# Altium PCB POETIC_AD_Input_V2.PcbDoc
Units mm, origin at the board's own origin, x right, y up, seen from the top; angles counter-clockwise.
Board outline 60 x 130 mm, 2 copper layers (Top Layer, Bottom Layer), stack 1.57 mm thick; 90 components, 63 nets, 313 pads, 24 vias.
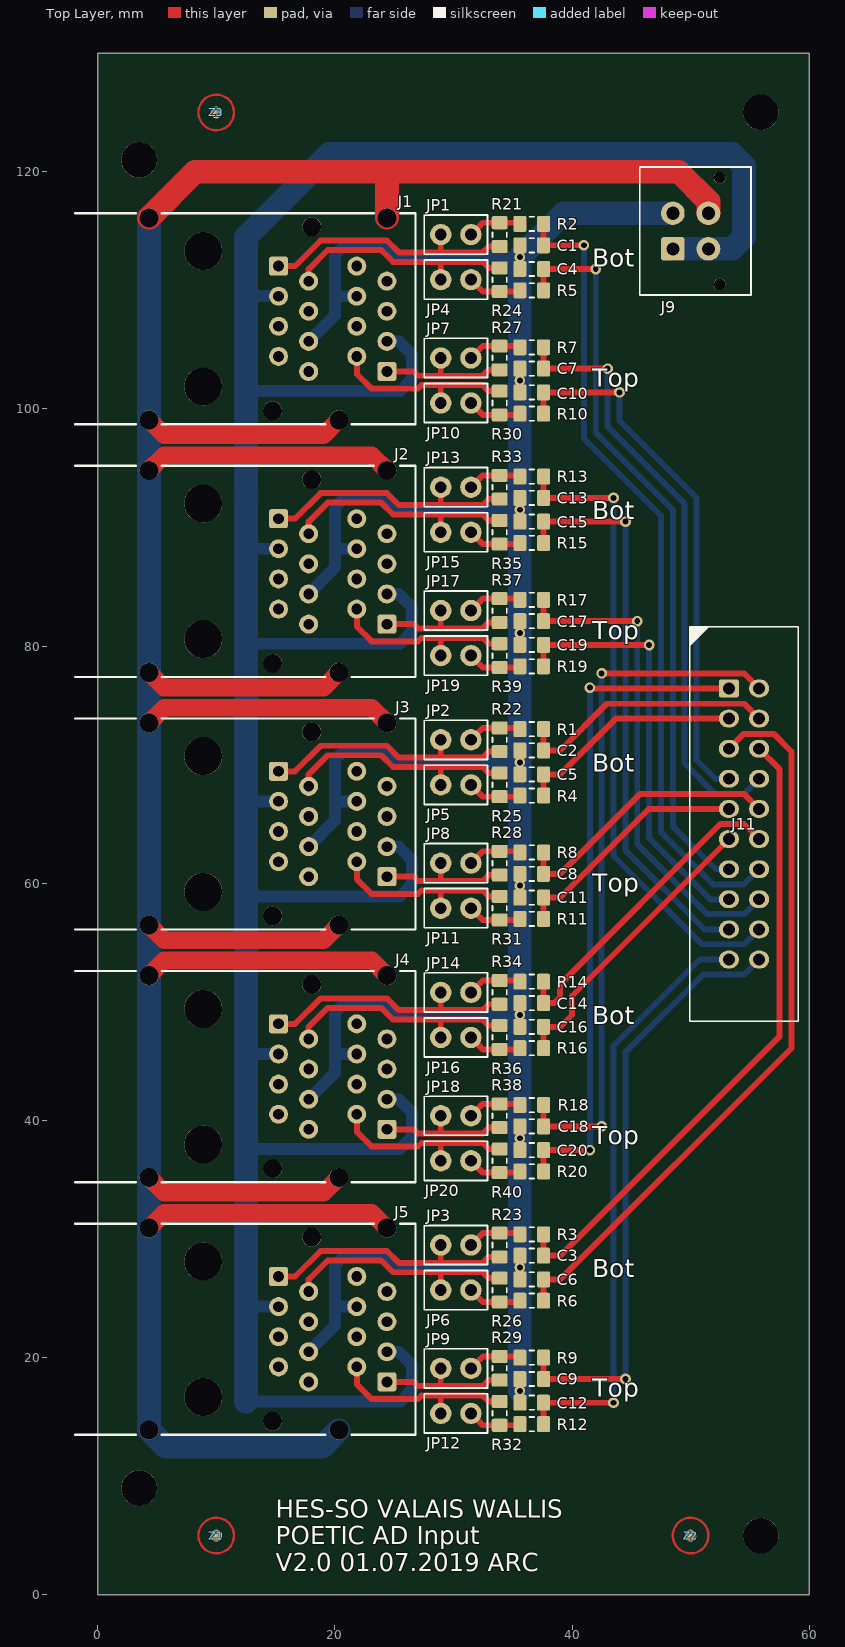
[diagram p0: Top Layer view]
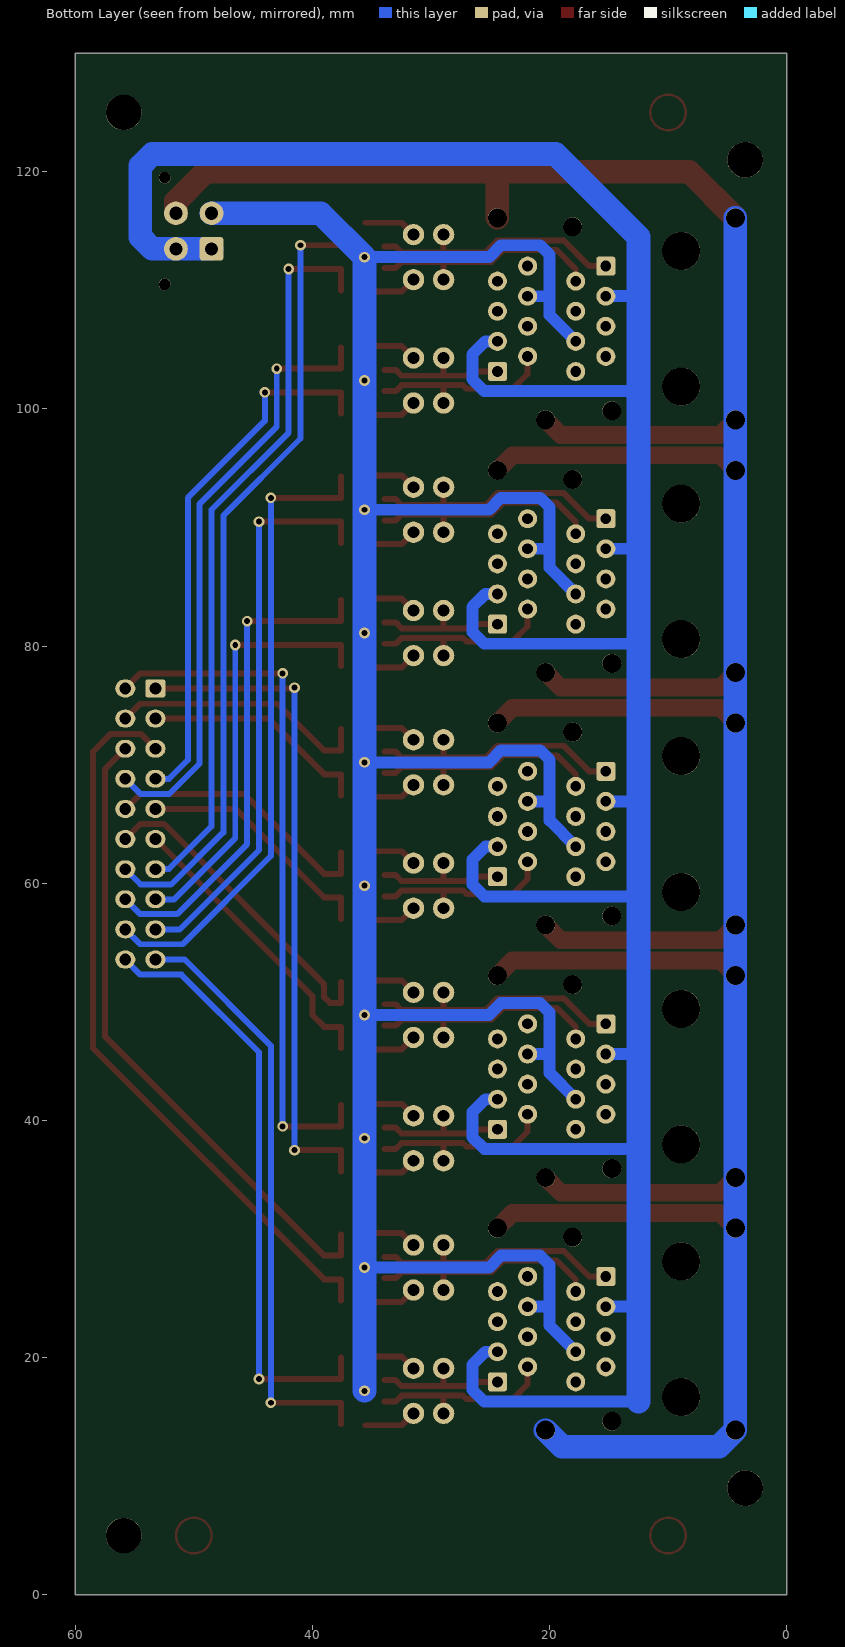
[diagram p1: Bottom Layer view, seen from below]

## Layer stack, top to bottom
Top Layer: signal copper 0.035
Dielectric 1: core 1.5, FR-4, Dk 4.2
Bottom Layer: signal copper 0.035

## Board outline
0,0 0,130 60,130 60,0

## Design rules (kind name [scope] priority, off if disabled: settings)
AcuteAngle [All] p1: minimum=9.00000000000000E+0001 checktracksonly=TRUE
AssemblyTestPointUsage [All] p1 off:
AssemblyTestpoint [All] p1 off: testpointundercomponent=TRUE minsize=1.016 maxsize=2.54 preferedsize=1.524 minholesize=0 maxholesize=1.016 preferedholesize=0.813 testpointgrid=0.025 usegrid=TRUE gridtolerance=0 allowsidetop=TRUE allowsidebottom=TRUE
BoardOutlineClearance [All] p1 off: gap=0.25 ignorepadtopadclearanceinfootprint=FALSE
Clearance [All] p1: gap=0.25 ignorepadtopadclearanceinfootprint=FALSE except(0: Arc-Hole Track-Hole SMDPad-Hole THPad-Hole Via-Hole Fill-Hole Poly-Hole Region-Hole Text-Hole)
ComponentClearance [All] p1 off: gap=0.25 collisioncheckmode=3 verticalgap=0.25 showdistances=FALSE
DiffPairsRouting [All] p1 off: maxlimit=0.254 minlimit=0.254 mostfreqgap=0.254 toplayer_minwidth=0.381 toplayer_maxwidth=0.381 toplayer_prefwidth=0.381 bottomlayer_minwidth=0.381 bottomlayer_maxwidth=0.381 bottomlayer_prefwidth=0.381 maxuncoupledlength=12.7
FabricationTestPointUsage [All] p1 off: valid=0 allowmultiple=FALSE
FabricationTestpoint [All] p1 off: side=3 testpointundercomponent=TRUE minsize=1.016 maxsize=2.54 preferedsize=1.524 minholesize=0 maxholesize=1.016 preferedholesize=0.813 testpointgrid=0.025 allowsidetop=TRUE allowsidebottom=TRUE usegrid=TRUE gridtolerance=0
FanoutControl Fanout_BGA [IsBGA] p1 off: bgadir=Out bgaviamode=Centered fanoutstyle=Auto fanoutdirection=Alternating viagrid=0.025 // Fanout_BGA (Default Rule)
FanoutControl Fanout_LCC [IsLCC] p2 off: bgadir=Out bgaviamode=Centered fanoutstyle=Auto fanoutdirection=Alternating viagrid=0.025 // Fanout_LCC (Default Rule)
FanoutControl Fanout_SOIC [IsSOIC] p3 off: bgadir=Out bgaviamode=Centered fanoutstyle=Auto fanoutdirection=Alternating viagrid=0.025 // Fanout_SOIC (Default Rule)
FanoutControl Fanout_Small [(CompPinCount < 5)] p4 off: bgadir=Out bgaviamode=Centered fanoutstyle=Auto fanoutdirection=OutThenIn viagrid=0.025 // Fanout_Small (Default Rule)
FanoutControl Fanout_Default [All] p5 off: bgadir=Out bgaviamode=Centered fanoutstyle=Auto fanoutdirection=Alternating viagrid=0.025 // Fanout_Default (Default Rule)
Height [All] p1 off: minheight=0 maxheight=25.4 prefheight=12.7
HoleSize [All] p1 off: absolutevalues=TRUE maxlimit=3 minlimit=0.15 maxpercent=80.000 minpercent=20.000
HoleToHoleClearance [All] p1 off: gap=0.25 allowstackedmicrovias=TRUE
LayerPairs [All] p1 off: enforce=TRUE
MinimumAnnularRing [All] p1 off: minimumring=0.35
MinimumSolderMaskSliver [All] p1 off: minsoldermaskwidth=0
PasteMaskExpansion [All] p1 off: expansion=0
PlaneClearance [All] p1: clearance=0.25
PlaneConnect [All] p1 off: planeconnectstyle=Relief reliefexpansion=0.5 reliefentries=4 reliefconductorwidth=0.25 reliefairgap=0.25
PolygonConnect [All] p1 off: connectstyle=Relief reliefconductorwidth=0.25 reliefentries=4 polygonreliefangle="90 Angle" airgapwidth=0.25
RoutingCorners [All] p1 off: cornerstyle=45-Degree minsetback=2.5 maxsetback=2.5
RoutingLayers [All] p1 off: top layer_v5=TRUE bottom layer_v5=TRUE
RoutingPriority [All] p1 off: routingpriority=0
RoutingTopology [All] p1 off: topology=Shortest
RoutingVias [All] p1: holewidth=0.5 width=0.9 viastyle="Through Hole" minholewidth=0.5 minwidth=0.9 maxholewidth=0.5 maxwidth=0.9
SilkToBoardRegionClearance [All] p1 off:
SilkToSilkClearance [All] p1 off: silktosilkclearance=0
SilkToSolderMaskClearance [IsPad] p1 off: minsilkscreentomaskgap=0 clearancetoexposedcopper=TRUE
SolderMaskExpansion [All] p1 off: expansion=0
Width [All] p1: maxlimit=10 minlimit=0.2 preferedwidth=0.5
4 further rules are at their usual default settings.

## Components (designator, comment, footprint, x,y, rotation, side; value= is the part's Value field where it differs from the comment)
C1 "4p7" "CAPACITOR 2012 REFLOW" 36.6,113.8 r180 top
C2 "4p7" "CAPACITOR 2012 REFLOW" 36.6,71.2 r180 top
C3 "4p7" "CAPACITOR 2012 REFLOW" 36.6,28.6 r180 top
C4 "4p7" "CAPACITOR 2012 REFLOW" 36.6,111.8 r0 top
C5 "4p7" "CAPACITOR 2012 REFLOW" 36.6,69.19 r0 top
C6 "4p7" "CAPACITOR 2012 REFLOW" 36.6,26.6 r0 top
C7 "4p7" "CAPACITOR 2012 REFLOW" 36.6,103.4 r180 top
C8 "4p7" "CAPACITOR 2012 REFLOW" 36.6,60.8 r180 top
C9 "4p7" "CAPACITOR 2012 REFLOW" 36.6,18.2 r180 top
C10 "4p7" "CAPACITOR 2012 REFLOW" 36.6,101.4 r0 top
C11 "4p7" "CAPACITOR 2012 REFLOW" 36.6,58.8 r0 top
C12 "4p7" "CAPACITOR 2012 REFLOW" 36.6,16.2 r0 top
C13 "4p7" "CAPACITOR 2012 REFLOW" 36.6,92.5 r180 top
C14 "4p7" "CAPACITOR 2012 REFLOW" 36.6,49.9 r180 top
C15 "4p7" "CAPACITOR 2012 REFLOW" 36.6,90.5 r0 top
C16 "4p7" "CAPACITOR 2012 REFLOW" 36.6,47.9 r0 top
C17 "4p7" "CAPACITOR 2012 REFLOW" 36.6,82.1 r180 top
C18 "4p7" "CAPACITOR 2012 REFLOW" 36.6,39.5 r180 top
C19 "4p7" "CAPACITOR 2012 REFLOW" 36.6,80.1 r0 top
C20 "4p7" "CAPACITOR 2012 REFLOW" 36.6,37.5 r0 top
J1 "E5908-4V0S54-L" "RJ45 8P8C PULSE E5908-4V0S54-L" 8.9,107.6 r270 top
J2 "E5908-4V0S54-L" "RJ45 8P8C PULSE E5908-4V0S54-L" 8.9,86.3 r270 top
J3 "E5908-4V0S54-L" "RJ45 8P8C PULSE E5908-4V0S54-L" 8.9,65 r270 top
J4 "E5908-4V0S54-L" "RJ45 8P8C PULSE E5908-4V0S54-L" 8.9,43.7 r270 top
J5 "E5908-4V0S54-L" "RJ45 8P8C PULSE E5908-4V0S54-L" 8.9,22.4 r270 top
J9 "43045-0412" "MOLEX 43045-0412" 50,115 r270 top
J11 "61202021621" "FlatCable2x10 2.54MM Straight TH" 54.5,65 r270 top
JP1 "890-18-036-10-803" "JUMPER2 TH" 30.2,114.7 r0 top
JP2 "890-18-036-10-803" "JUMPER2 TH" 30.2,72.1 r0 top
JP3 "890-18-036-10-803" "JUMPER2 TH" 30.2,29.5 r0 top
JP4 "890-18-036-10-803" "JUMPER2 TH" 30.2,110.9 r0 top
JP5 "890-18-036-10-803" "JUMPER2 TH" 30.2,68.3 r0 top
JP6 "890-18-036-10-803" "JUMPER2 TH" 30.2,25.7 r0 top
JP7 "890-18-036-10-803" "JUMPER2 TH" 30.2,104.3 r0 top
JP8 "890-18-036-10-803" "JUMPER2 TH" 30.2,61.7 r0 top
JP9 "890-18-036-10-803" "JUMPER2 TH" 30.2,19.1 r0 top
JP10 "890-18-036-10-803" "JUMPER2 TH" 30.2,100.5 r0 top
JP11 "890-18-036-10-803" "JUMPER2 TH" 30.2,57.9 r0 top
JP12 "890-18-036-10-803" "JUMPER2 TH" 30.2,15.3 r0 top
JP13 "890-18-036-10-803" "JUMPER2 TH" 30.2,93.4 r0 top
JP14 "890-18-036-10-803" "JUMPER2 TH" 30.2,50.8 r0 top
JP15 "890-18-036-10-803" "JUMPER2 TH" 30.2,89.6 r0 top
JP16 "890-18-036-10-803" "JUMPER2 TH" 30.2,47 r0 top
JP17 "890-18-036-10-803" "JUMPER2 TH" 30.2,83 r0 top
JP18 "890-18-036-10-803" "JUMPER2 TH" 30.2,40.4 r0 top
JP19 "890-18-036-10-803" "JUMPER2 TH" 30.2,79.2 r0 top
JP20 "890-18-036-10-803" "JUMPER2 TH" 30.2,36.6 r0 top
R1 "1k8" "RESISTOR 2012 REFLOW" 36.6,73 r0 top
R2 "1k8" "RESISTOR 2012 REFLOW" 36.6,115.6 r0 top
R3 "1k8" "RESISTOR 2012 REFLOW" 36.6,30.4 r0 top
R4 "1k8" "RESISTOR 2012 REFLOW" 36.6,67.4 r0 top
R5 "1k8" "RESISTOR 2012 REFLOW" 36.6,110 r0 top
R6 "1k8" "RESISTOR 2012 REFLOW" 36.6,24.8 r0 top
R7 "1k8" "RESISTOR 2012 REFLOW" 36.6,105.2 r0 top
R8 "1k8" "RESISTOR 2012 REFLOW" 36.6,62.6 r0 top
R9 "1k8" "RESISTOR 2012 REFLOW" 36.6,20 r0 top
R10 "1k8" "RESISTOR 2012 REFLOW" 36.6,99.6 r0 top
R11 "1k8" "RESISTOR 2012 REFLOW" 36.6,57 r0 top
R12 "1k8" "RESISTOR 2012 REFLOW" 36.6,14.4 r0 top
R13 "1k8" "RESISTOR 2012 REFLOW" 36.6,94.3 r0 top
R14 "1k8" "RESISTOR 2012 REFLOW" 36.6,51.7 r0 top
R15 "1k8" "RESISTOR 2012 REFLOW" 36.6,88.7 r0 top
R16 "1k8" "RESISTOR 2012 REFLOW" 36.6,46.1 r0 top
R17 "1k8" "RESISTOR 2012 REFLOW" 36.6,83.9 r0 top
R18 "1k8" "RESISTOR 2012 REFLOW" 36.6,41.3 r0 top
R19 "1k8" "RESISTOR 2012 REFLOW" 36.6,78.3 r0 top
R20 "1k8" "RESISTOR 2012 REFLOW" 36.6,35.7 r0 top
R21 "10k" "RESISTOR 2012 REFLOW" 33.9,114.7 r90 top
R22 "10k" "RESISTOR 2012 REFLOW" 33.9,72.1 r90 top
R23 "10k" "RESISTOR 2012 REFLOW" 33.9,29.5 r90 top
R24 "10k" "RESISTOR 2012 REFLOW" 33.9,110.9 r90 top
R25 "10k" "RESISTOR 2012 REFLOW" 33.9,68.3 r90 top
R26 "10k" "RESISTOR 2012 REFLOW" 33.9,25.7 r90 top
R27 "10k" "RESISTOR 2012 REFLOW" 33.9,104.3 r90 top
R28 "10k" "RESISTOR 2012 REFLOW" 33.9,61.7 r90 top
R29 "10k" "RESISTOR 2012 REFLOW" 33.9,19.1 r90 top
R30 "10k" "RESISTOR 2012 REFLOW" 33.9,100.5 r90 top
R31 "10k" "RESISTOR 2012 REFLOW" 33.9,57.9 r90 top
R32 "10k" "RESISTOR 2012 REFLOW" 33.9,15.3 r90 top
R33 "10k" "RESISTOR 2012 REFLOW" 33.9,93.4 r90 top
R34 "10k" "RESISTOR 2012 REFLOW" 33.9,50.8 r90 top
R35 "10k" "RESISTOR 2012 REFLOW" 33.9,89.6 r90 top
R36 "10k" "RESISTOR 2012 REFLOW" 33.9,47 r90 top
R37 "10k" "RESISTOR 2012 REFLOW" 33.9,83 r90 top
R38 "10k" "RESISTOR 2012 REFLOW" 33.9,40.4 r90 top
R39 "10k" "RESISTOR 2012 REFLOW" 33.9,79.2 r90 top
R40 "10k" "RESISTOR 2012 REFLOW" 33.9,36.6 r90 top
Z1 "1 - 3" FIDUCIAL 10,5 r0 top
Z2 "1 - 3" FIDUCIAL 50,5 r0 top
Z3 "1 - 3" FIDUCIAL 10,125 r0 top

## Footprints (in the part's own frame and the unit in brackets; to place one, negate y for a bottom-side part, rotate by r counter-clockwise, add the part's x,y. Pads: shape width x height; smd on the part's side, far side on the other; paste and mask are expansions set on the pad)
"CAPACITOR 2012 REFLOW" [mm] "Capacitor SMD 2.0x1.2mm (0805-imperial)"
  rrect25% 1.1x1.35 smd: 1(-1,0) 2(1,0)
  silkscreen extent -0.2,-0.6 0.2,0.6, body extent -1,-0.6 1,0.6, height 1
FIDUCIAL [mm] "FIDUCIAL Din 1mm Dout 3mm"
  round 1 smd mask+1.2: 1(0,0)
  Top Layer circle w0.2: c0,0 r1.5
"FlatCable2x10 2.54MM Straight TH" [mm] "FlatCable2x10 2.54MM Straight TH, DIN 41651, Generic"
  rrect25% 1.5x1.7 hole 1: 1(-11.43,-1.27)
  oval 1.5x1.7 hole 1: 2(-11.43,1.27) 3(-8.89,-1.27) 4(-8.89,1.27) 5(-6.35,-1.27) 6(-6.35,1.27) 7(-3.81,-1.27) 8(-3.81,1.27) 9(-1.27,-1.27) 10(-1.27,1.27) 11(1.27,-1.27) 12(1.27,1.27) 13(3.81,-1.27) 14(3.81,1.27) 15(6.35,-1.27) 16(6.35,1.27) 17(8.89,-1.27) 18(8.89,1.27) 19(11.43,-1.27) 20(11.43,1.27)
  silkscreen extent -16.65,-4.59 16.64,4.57, body extent -16.51,-4.45 16.51,4.46, height 9.1
"JUMPER2 TH" [mm] "JUMPER2 TH"
  round 1.8 hole 1 paste-0.8: 1(-1.27,0) 2(1.27,0)
  silkscreen extent -2.67,-1.65 2.67,1.65, body extent -2.61,-1.6 2.61,1.6, height 8.5
"MOLEX 43045-0412" [mm] "Micro-Fit 3.0 Vertical Header, 3.00mm Pitch, Dual Row, 4 Circuits"
  round 1 hole 1 paste-25.4 mask-25.4: 0(-4.5,2.45) 0(4.5,2.45)
  rrect25% 2x2 hole 1.1: 1(1.5,-1.5)
  round 2 hole 1.1: 2(-1.5,-1.5) 3(1.5,1.5) 4(-1.5,1.5)
  silkscreen extent -5.4,-4.3 5.4,5.1, body extent -5.1,-4 5.1,4.8, height 10
"RESISTOR 2012 REFLOW" [mm] "Resistor SMD 2.0x1.2mm (0805-imperial)"
  rrect25% 1.1x1.35 smd: 1(-1,0) 2(1,0)
  silkscreen extent -0.2,-0.6 0.2,0.6, body extent -1,-0.6 1,0.6, height 0.6
"RJ45 8P8C PULSE E5908-4V0S54-L" [mm] "RJ45 2X1 8P8C Ethernet Connectors CONN 30u Au THT"
  round 1.6 hole 1.6 unplated: 0(-7.755,9.15) 0(7.755,5.85) 9(-8.515,-4.57) 10(-8.515,15.5) 11(8.515,-4.57) 12(8.515,11.43)
  round 3.2 hole 3.2 unplated: 0(-5.715,0) 0(5.715,0)
  rrect25% 1.6x1.6 hole 0.9: 1A(-4.445,6.35) 1B(4.445,15.49)
  round 1.6 hole 0.9: 2A(-3.175,8.89) 2B(3.175,12.95) 3A(-1.905,6.35) 3B(1.905,15.49) 4A(-0.635,8.89) 4B(0.635,12.95) 5A(0.635,6.35) 5B(-0.635,15.49) 6A(1.905,8.89) 6B(-1.905,12.95) 7A(3.175,6.35) 7B(-3.175,15.49) 8A(4.445,8.89) 8B(-4.445,12.95)
  silkscreen extent -8.9,-10.8 8.9,17.9, body extent -8.5,-10.8 8.5,17.5, height 25.3

## Part data
C1 C2 C3 C4 C5 C6 C7 C8 C9 C10 C11 C12 C13 C14 C15 C16 C17 C18 C19 C20: library part Capacitor, "Capacitor X7R 50V 2012(0805)"
J1 J2 J3 J4 J5: library part "RJ45 8P8C PULSE E5908-4V0S54-L", "RJ45 2X1 8P8C Ethernet Connectors CONN 30u Au THT", Manufacturer="Pulse Electronics", Mouser No.=673-E5908-4V0S54-L
J9: library part "MOLEX 43045-0412", "Micro-Fit 3.0 Vertical Header, 3.00mm Pitch, Dual Row, 4 Circuits", Manufacturer=Molex, Mouser No.=538-43045-0412
J11: library part FlatCable2x10, "FlatCable2x10 2.54mm Straight TH", Manufacturer="Wurth Elektronik", Mouser No.=710-61202021621
JP1 JP2 JP3 JP4 JP5 JP6 JP7 JP8 JP9 JP10 JP11 JP12 JP13 JP14 JP15 JP16 JP17 JP18 JP19 JP20: library part "JUMPER 2 POS", "JUMPER 2 POS", Manufacturer=PRECI-DIP, Distrelec No.=143-83-920
R1 R2 R3 R4 R5 R6 R7 R8 R9 R10 R11 R12 R13 R14 R15 R16 R17 R18 R19 R20 R21 R22 R23 R24 R25 R26 R27 R28 R29 R30 R31 R32 R33 R34 R35 R36 R37 R38 R39 R40: library part Resistor, "Resistor 1% 50V 125mW 2012(0805)"
Z1 Z2 Z3: library part FIDUCIAL, "FIDUCIAL Din 1mm Dout 3mm"

## Free pads (board coordinates)
  round 3 hole 3 unplated: 0(3.5,9) 0(3.5,121) 0(55.911,5) 0(55.911,125)

## Via types
v1: diameter 0.9, hole 0.5, Top Layer to Bottom Layer, tented both sides, 24 vias

## Nets (pads, with @x,y where several pads share a name; then routed paths per layer and width w, separated by ;. In a path a pad name is that pad's centre, name@x,y a point inside that pad or via, vN(x,y) a via of type N, cw(c..) or ccw(c..) an arc to the next point about the centre after c; other vN are vias at no path point)
+5V_MEAS: J1.3A J1.3B J2.3A J2.3B J3.3A J3.3B J4.3A J4.3B J5.3A J5.3B J9.1 J9.3 | length 264.6
  Bottom Layer w1: 12.5,16.3 25.5,16.3 26.5,17.3 26.5,19.4 25.405,20.495 J5.3B ; 12.5,24.32 J5.3A@15.25,24.32 ; 12.5,37.6 25.5,37.6 26.5,38.6 26.5,40.7 25.405,41.795 J4.3B ; 12.5,45.62 J4.3A@15.25,45.62 ; 12.5,58.9 25.5,58.9 26.5,59.9 26.5,62 25.405,63.095 J3.3B ; 12.5,66.885 J3.3A@15.26,66.885 ; 12.5,80.2 25.5,80.2 26.5,81.2 26.5,83.3 25.405,84.395 J2.3B ; 12.5,88.205 J2.3A ; 12.5,101.5 25.5,101.5 26.5,102.5 26.5,104.6 25.405,105.695 J1.3B ; 12.5,109.52 J1.3A@15.25,109.52
  Bottom Layer w2: 12.5,16.3 12.5,24.32 12.5,37.6 12.5,45.62 12.5,58.9 12.5,66.885 12.5,80.2 12.5,88.205 12.5,92.4 ; 12.5,92.9 12.5,101.5 12.5,109.52 12.5,114.5 19.5,121.5 53.5,121.5 54.5,120.5 54.5,114.5 53.5,113.5 J9.3 J9.1
EARTH: J1.9 J1.10 J1.11 J1.12 J2.9 J2.10 J2.11 J2.12 J3.9 J3.10 J3.11 J3.12 J4.9 J4.10 J4.11 J4.12 J5.9 J5.10 J5.11 J5.12 J9.4 | length 326.9
  Top Layer w1.5: J5.9 5.615,32.2 23.115,32.2 J5.10 ; J4.11 5.615,33.9 19.045,33.9 J4.12 ; J4.9 5.615,53.5 23.115,53.5 J4.10 ; J3.11 5.615,55.2 19.045,55.2 J3.12 ; J3.9 5.615,74.8 23.115,74.8 J3.10 ; J2.11 5.615,76.5 19.045,76.5 J2.12 ; J2.9 5.615,96.1 23.115,96.1 J2.10 ; J1.11 5.615,97.8 19.045,97.8 J1.12
  Top Layer w2: J1.9 8.215,120 24.4,120 ; J1.10 24.4,120 ; J9.4 51.5,117.5 49,120 24.4,120
  Bottom Layer w2: J5.11 5.715,12.5 18.945,12.5 J5.12 ; J5.11@4.33,13.9 J5.9 J3.9 J2.11 J2.9 J1.9
GND_A: C1.2 C2.2 C3.2 C4.1 C5.1 C6.1 C7.2 C8.2 C9.2 C10.1 C11.1 C12.1 C13.2 C14.2 C15.1 C16.1 C17.2 C18.2 C19.1 C20.1 J1.6A J1.6B J2.6A J2.6B J3.6A J3.6B J4.6A J4.6B J5.6A J5.6B J9.2 | length 242.1
  Bottom Layer w1: J5.6A 20,22.705 20,24.305 ; J4.6A 20,44.005 20,45.605 ; J3.6A 20,65.305 20,66.905 ; J2.6A 20,86.605 20,88.205 ; J1.6A 20,107.905 20,109.505 ; J5.6B 20,24.305 ; J4.6B 20,45.605 ; J3.6B 20,66.905 ; J2.6B 20,88.205 ; J1.6B 20,109.505 ; v1(35.6,27.6) 25.1,27.6 24.1,28.6 20.8,28.6 20,27.8 20,24.305 ; v1(35.6,48.9) 25.1,48.9 24.1,49.9 20.8,49.9 20,49.1 20,45.605 ; v1(35.6,70.2) 25.1,70.2 24.1,71.2 20.8,71.2 20,70.4 20,66.905 ; v1(35.6,91.5) 25.1,91.5 24.1,92.5 20.8,92.5 20,91.7 20,88.205 ; v1(35.6,112.8) 25.1,112.8 24.1,113.8 20.8,113.8 20,113 20,109.505
  Bottom Layer w2: v1(35.6,17.2) v1(35.6,27.6) v1(35.6,48.9) v1(35.6,70.2) v1(35.6,81.1) v1(35.6,91.5) v1(35.6,112.8) 39.3,116.5 J9.2
  other v1: 35.6,38.5 35.6,59.8 35.6,102.4
MEAS_0_MINUS: C20.2 J11.1 R20.2 | length 56.5
  Top Layer w0.5: R20.2 C20.2 v1(41.5,37.5) ; v1(41.5,76.5) 41.57,76.43 J11.1
  Bottom Layer w0.5: v1(41.5,37.5) v1(41.5,76.5)
MEAS_0_PLUS: C18.1 J11.2 R18.2 | length 58.7
  Top Layer w0.5: R18.2 C18.1 v1(42.5,39.5) ; v1(42.5,77.7) 54.5,77.7 J11.2
  Bottom Layer w0.5: v1(42.5,39.5) v1(42.5,77.7)
MEAS_1_MINUS: C5.2 J11.3 R4.2 | length 19.4
  Top Layer w0.5: R4.2 C5.2 39,69.19 ; 39,69.2 43.717,73.903 J11.3
MEAS_1_PLUS: C2.1 J11.4 R1.2 | length 22.1
  Top Layer w0.5: R1.2 C2.1 39,71.2 42.94,75.14 54.52,75.14 J11.4
MEAS_2_MINUS: C6.2 J11.5 R6.2 | length 62.6
  Top Layer w0.5: R6.2 37.6,26.59 39,26.59 ; 39,26.6 58.5,46.1 58.5,71.1 57,72.6 54.48,72.6 J11.5 J11.5@53.63,71.35
MEAS_2_PLUS: C3.1 J11.6 R3.2 | length 54.3
  Top Layer w0.5: R3.2 C3.1 39,28.6 57.5,47.1 57.5,69.62 J11.6
MEAS_3_MINUS: C10.2 J11.7 R10.2 | length 45.3
  Top Layer w0.5: R10.2 C10.2 v1(44,101.4)
  Bottom Layer w0.5: v1(44,101.4) 44,99 50.5,92.5 50.5,70.4 52.09,68.81 J11.7
MEAS_3_PLUS: C7.1 J11.8 R7.2 | length 51.1
  Top Layer w0.5: R7.2 C7.1 v1(43,103.4)
  Bottom Layer w0.5: v1(43,103.4) 43,98.5 49.5,92 49.5,70.1 52.08,67.52 54.48,67.52 J11.8
MEAS_4_MINUS: C11.2 J11.9 R11.2 | length 20.5
  Top Layer w0.5: R11.2 C11.2 39,58.8 46.47,66.27 J11.9
MEAS_4_PLUS: C8.1 J11.10 R8.2 | length 23.3
  Top Layer w0.5: R8.2 C8.1 39,60.8 45.72,67.52 54.52,67.52 J11.10
MEAS_5_MINUS: C16.2 J11.11 R16.2 | length 24.9
  Top Layer w0.5: R16.2 37.6,47.89 39,47.89 40,48.89 40,50.5 J11.11
MEAS_5_PLUS: C14.1 J11.12 R14.2 | length 27.4
  Top Layer w0.5: R14.2 C14.1 38.5,49.9 39,50.4 39,51.5 52.5,65 54.5,65 J11.12
MEAS_6_MINUS: C4.2 J11.13 R5.2 | length 62.7
  Top Layer w0.5: R5.2 37.6,111.79 v1@42,111.79
  Bottom Layer w0.5: v1(42,111.8) 42,98 48.5,91.5 48.5,64.8 52.1,61.2 53.22,61.2 J11.13 J11.13@53.83,61.19
MEAS_6_PLUS: C1.1 J11.14 R2.2 | length 68
  Top Layer w0.5: R2.2 C1.1 v1(41,113.8)
  Bottom Layer w0.5: v1(41,113.8) 41,97.5 47.5,91 47.5,64.3 51.9,59.9 54.48,59.9 J11.14
MEAS_7_MINUS: C19.2 J11.15 R19.2 | length 36.5
  Top Layer w0.5: R19.2 C19.2 v1(46.5,80.1)
  Bottom Layer w0.5: v1(46.5,80.1) 46.5,63.8 51.65,58.65 J11.15 J11.15@53.83,58.65
MEAS_7_PLUS: C17.1 J11.16 R17.2 | length 41.7
  Top Layer w0.5: R17.2 C17.1 v1(45.5,82.1)
  Bottom Layer w0.5: v1(45.5,82.1) 45.5,63.3 51.4,57.4 54.52,57.4 J11.16
MEAS_8_MINUS: C15.2 J11.17 R15.2 | length 47.9
  Top Layer w0.5: R15.2 37.6,90.49 v1@44.5,90.49
  Bottom Layer w0.5: v1(44.5,90.5) 44.5,62.8 51.19,56.11 J11.17
MEAS_8_PLUS: C13.1 J11.18 R13.2 | length 53.8
  Top Layer w0.5: R13.2 C13.1 v1(43.5,92.5)
  Bottom Layer w0.5: v1(43.5,92.5) 43.5,62.3 50.94,54.86 54.52,54.86 J11.18
MEAS_9_MINUS: C12.2 J11.19 R12.2 | length 50.5
  Top Layer w0.5: R12.2 C12.2 v1(43.5,16.2)
  Bottom Layer w0.5: v1(43.5,16.2) 43.5,46.3 50.77,53.57 J11.19
MEAS_9_PLUS: C9.1 J11.20 R9.2 | length 50.8
  Top Layer w0.5: R9.2 C9.1 v1(44.5,18.2)
  Bottom Layer w0.5: v1(44.5,18.2) 44.5,45.755 51.045,52.3 54.5,52.3 J11.20
NetJ1_1A: J1.1A JP1.1 R21.1 | length 21.7
  Top Layer w0.5: J1.1A 16.645,112.045 18.8,114.2 24.4,114.2 25.4,113.2 28.93,113.2 ; JP1.1 28.93,113.2 ; R21.1 32.975,113.7 32.475,113.2 28.93,113.2
NetJ1_1B: J1.1B JP7.1 R27.1 | length 11.4
  Top Layer w0.5: J1.1B 26.655,103.155 27.01,102.8 28.93,102.8 ; JP7.1 28.93,102.8 ; R27.1 32.975,103.3 32.475,102.8 28.93,102.8
NetJ1_2A: J1.2A JP4.1 R24.2 | length 19.9
  Top Layer w0.5: J1.2A 17.79,111.79 19.4,113.4 23.9,113.4 24.9,112.4 28.93,112.4 ; JP4.1 28.93,112.4 ; R24.2 32.97,111.9 32.47,112.4 28.93,112.4
NetJ1_2B: J1.2B JP10.1 R30.2 | length 15.9
  Top Layer w0.5: J1.2B 21.85,102.95 23.1,101.7 27,101.7 27.3,102 28.93,102 ; JP10.1 28.93,102 ; R30.2 32.97,101.5 32.47,102 28.93,102
NetJ2_1A: J2.1A JP13.1 R33.1 | length 21.7
  Top Layer w0.5: J2.1A 16.645,90.745 18.8,92.9 24.4,92.9 25.4,91.9 28.93,91.9 ; JP13.1 28.93,91.9 ; R33.1 32.975,92.4 32.475,91.9 28.93,91.9
NetJ2_1B: J2.1B JP17.1 R37.1 | length 11.4
  Top Layer w0.5: J2.1B 26.655,81.855 27.01,81.5 28.93,81.5 ; JP17.1 28.93,81.5 ; R37.1 32.975,82 32.475,81.5 28.93,81.5
NetJ2_2A: J2.2A JP15.1 R35.2 | length 19.9
  Top Layer w0.5: J2.2A 17.79,90.49 19.4,92.1 23.9,92.1 24.9,91.1 28.93,91.1 ; JP15.1 28.93,91.1 ; R35.2 32.97,90.6 32.47,91.1 28.93,91.1
NetJ2_2B: J2.2B JP19.1 R39.2 | length 15.9
  Top Layer w0.5: J2.2B 21.85,81.65 23.1,80.4 27,80.4 27.3,80.7 28.93,80.7 ; JP19.1 28.93,80.7 ; R39.2 32.97,80.2 32.47,80.7 28.93,80.7
NetJ3_1A: J3.1A JP2.1 R22.1 | length 21.7
  Top Layer w0.5: J3.1A 16.645,69.445 18.8,71.6 24.4,71.6 25.4,70.6 28.93,70.6 ; JP2.1 28.93,70.6 ; R22.1 32.975,71.1 32.475,70.6 28.93,70.6
NetJ3_1B: J3.1B JP8.1 R28.1 | length 11.4
  Top Layer w0.5: J3.1B 26.655,60.555 27.01,60.2 28.93,60.2 ; JP8.1 28.93,60.2 ; R28.1 32.975,60.7 32.475,60.2 28.93,60.2
NetJ3_2A: J3.2A JP5.1 R25.2 | length 19.9
  Top Layer w0.5: J3.2A 17.79,69.19 19.4,70.8 23.9,70.8 24.9,69.8 28.93,69.8 ; JP5.1 28.93,69.8 ; R25.2 32.97,69.3 32.47,69.8 28.93,69.8
NetJ3_2B: J3.2B JP11.1 R31.2 | length 15.9
  Top Layer w0.5: J3.2B 21.85,60.35 23.1,59.1 27,59.1 27.3,59.4 28.93,59.4 ; JP11.1 28.93,59.4 ; R31.2 32.97,58.9 32.47,59.4 28.93,59.4
NetJ4_1A: J4.1A JP14.1 R34.1 | length 21.7
  Top Layer w0.5: J4.1A 16.645,48.145 18.8,50.3 24.4,50.3 25.4,49.3 28.93,49.3 ; JP14.1 28.93,49.3 ; R34.1 32.975,49.8 32.475,49.3 28.93,49.3
NetJ4_1B: J4.1B JP18.1 R38.1 | length 11.4
  Top Layer w0.5: J4.1B 26.655,39.255 27.01,38.9 28.93,38.9 ; JP18.1 28.93,38.9 ; R38.1 32.975,39.4 32.475,38.9 28.93,38.9
NetJ4_2A: J4.2A JP16.1 R36.2 | length 19.9
  Top Layer w0.5: J4.2A 17.79,47.89 19.4,49.5 23.9,49.5 24.9,48.5 28.93,48.5 ; JP16.1 28.93,48.5 ; R36.2 32.97,48 32.47,48.5 28.93,48.5
NetJ4_2B: J4.2B JP20.1 R40.2 | length 15.9
  Top Layer w0.5: J4.2B 21.85,39.05 23.1,37.8 27,37.8 27.3,38.1 28.93,38.1 ; JP20.1 28.93,38.1 ; R40.2 32.97,37.6 32.47,38.1 28.93,38.1
NetJ5_1A: J5.1A JP3.1 R23.1 | length 21.7
  Top Layer w0.5: J5.1A 16.645,26.845 18.8,29 24.4,29 25.4,28 28.93,28 ; JP3.1 28.93,28 ; R23.1 32.975,28.5 32.475,28 28.93,28
NetJ5_1B: J5.1B JP9.1 R29.1 | length 11.4
  Top Layer w0.5: J5.1B 26.655,17.955 27.01,17.6 28.93,17.6 ; JP9.1 28.93,17.6 ; R29.1 32.975,18.1 32.475,17.6 28.93,17.6
NetJ5_2A: J5.2A JP6.1 R26.2 | length 19.9
  Top Layer w0.5: J5.2A 17.79,26.59 19.4,28.2 23.9,28.2 24.9,27.2 28.93,27.2 ; JP6.1 28.93,27.2 ; R26.2 32.97,26.7 32.47,27.2 28.93,27.2
NetJ5_2B: J5.2B JP12.1 R32.2 | length 15.9
  Top Layer w0.5: J5.2B 21.85,17.75 23.1,16.5 27,16.5 27.3,16.8 28.93,16.8 ; JP12.1 28.93,16.8 ; R32.2 32.97,16.3 32.47,16.8 28.93,16.8
NetJP1_2: JP1.2 R2.1 R21.2 | length 4.4
  Top Layer w0.5: JP1.2 32.47,115.7 R21.2 R2.1@35.5,115.7
NetJP2_2: JP2.2 R1.1 R22.2 | length 4.4
  Top Layer w0.5: JP2.2 32.47,73.1 R22.2 R1.1@35.5,73.1
NetJP3_2: JP3.2 R3.1 R23.2 | length 4.4
  Top Layer w0.5: JP3.2 32.47,30.5 R23.2 R3.1@35.5,30.5
NetJP4_2: JP4.2 R5.1 R24.1 | length 4.4
  Top Layer w0.5: JP4.2 32.47,109.9 R24.1 R5.1@35.5,109.9
NetJP5_2: JP5.2 R4.1 R25.1 | length 4.4
  Top Layer w0.5: JP5.2 32.47,67.3 R25.1 R4.1@35.5,67.3
NetJP6_2: JP6.2 R6.1 R26.1 | length 4.4
  Top Layer w0.5: JP6.2 32.47,24.7 R26.1 R6.1@35.5,24.7
NetJP7_2: JP7.2 R7.1 R27.2 | length 4.4
  Top Layer w0.5: JP7.2 32.47,105.3 R27.2 R7.1@35.5,105.3
NetJP8_2: JP8.2 R8.1 R28.2 | length 4.4
  Top Layer w0.5: JP8.2 32.47,62.7 R28.2 R8.1@35.5,62.7
NetJP9_2: JP9.2 R9.1 R29.2 | length 4.4
  Top Layer w0.5: JP9.2 32.47,20.1 R29.2 R9.1@35.5,20.1
NetJP10_2: JP10.2 R10.1 R30.1 | length 4.4
  Top Layer w0.5: JP10.2 32.47,99.5 R30.1 R10.1@35.5,99.5
NetJP11_2: JP11.2 R11.1 R31.1 | length 4.4
  Top Layer w0.5: JP11.2 32.47,56.9 R31.1 R11.1@35.5,56.9
NetJP12_2: JP12.2 R12.1 R32.1 | length 4.4
  Top Layer w0.5: JP12.2 32.47,14.3 R32.1 R12.1@35.5,14.3
NetJP13_2: JP13.2 R13.1 R33.2 | length 4.4
  Top Layer w0.5: JP13.2 32.47,94.4 R33.2 R13.1@35.5,94.4
NetJP14_2: JP14.2 R14.1 R34.2 | length 4.4
  Top Layer w0.5: JP14.2 32.47,51.8 R34.2 R14.1@35.5,51.8
NetJP15_2: JP15.2 R15.1 R35.1 | length 4.4
  Top Layer w0.5: JP15.2 32.47,88.6 R35.1 R15.1@35.5,88.6
NetJP16_2: JP16.2 R16.1 R36.1 | length 4.4
  Top Layer w0.5: JP16.2 32.47,46 R36.1 R16.1@35.5,46
NetJP17_2: JP17.2 R17.1 R37.2 | length 4.4
  Top Layer w0.5: JP17.2 32.47,84 R37.2 R17.1@35.5,84
NetJP18_2: JP18.2 R18.1 R38.2 | length 4.4
  Top Layer w0.5: JP18.2 32.47,41.4 R38.2 R18.1@35.5,41.4
NetJP19_2: JP19.2 R19.1 R39.1 | length 4.4
  Top Layer w0.5: JP19.2 32.47,78.2 R39.1 R19.1@35.5,78.2
NetJP20_2: JP20.2 R20.1 R40.1 | length 4.4
  Top Layer w0.5: JP20.2 32.47,35.6 R40.1 R20.1@35.5,35.6
pads on no net: J1.0 J1.4A J1.4B J1.5A J1.5B J1.7A J1.7B J1.8A J1.8B J2.0 J2.4A J2.4B J2.5A J2.5B J2.7A J2.7B J2.8A J2.8B J3.0 J3.4A J3.4B J3.5A J3.5B J3.7A J3.7B J3.8A J3.8B J4.0 J4.4A J4.4B J4.5A J4.5B J4.7A J4.7B J4.8A J4.8B J5.0 J5.4A J5.4B J5.5A J5.5B J5.7A J5.7B J5.8A J5.8B J9.0 Z1.1 Z2.1 Z3.1

## Silkscreen, mask and mechanical layers (free items; w line width, h text height)
Top Overlay:
  text "Bot" at 41.7,112 h1.52
  text "Top" at 41.7,101.885 h1.52
  text "Bot" at 41.7,90.7 h1.52
  text "Top" at 41.7,80.585 h1.52
  text "Bot" at 41.7,69.4 h1.52
  text "Top" at 41.7,59.285 h1.52
  text "Bot" at 41.7,48.1 h1.52
  text "Top" at 41.7,37.985 h1.52
  text "Bot" at 41.7,26.8 h1.52
  text "Top" at 41.7,16.685 h1.52
  text "HES-SO VALAIS WALLIS / POETIC AD Input / V2.0 01.07.2019 ARC" at 15,2 h1.5
Mechanical 1:
  the board outline again, w0.15